# EAGLE board RK3188-EVB_Rev_C (EAGLE 9.6.2), part 1 of 3
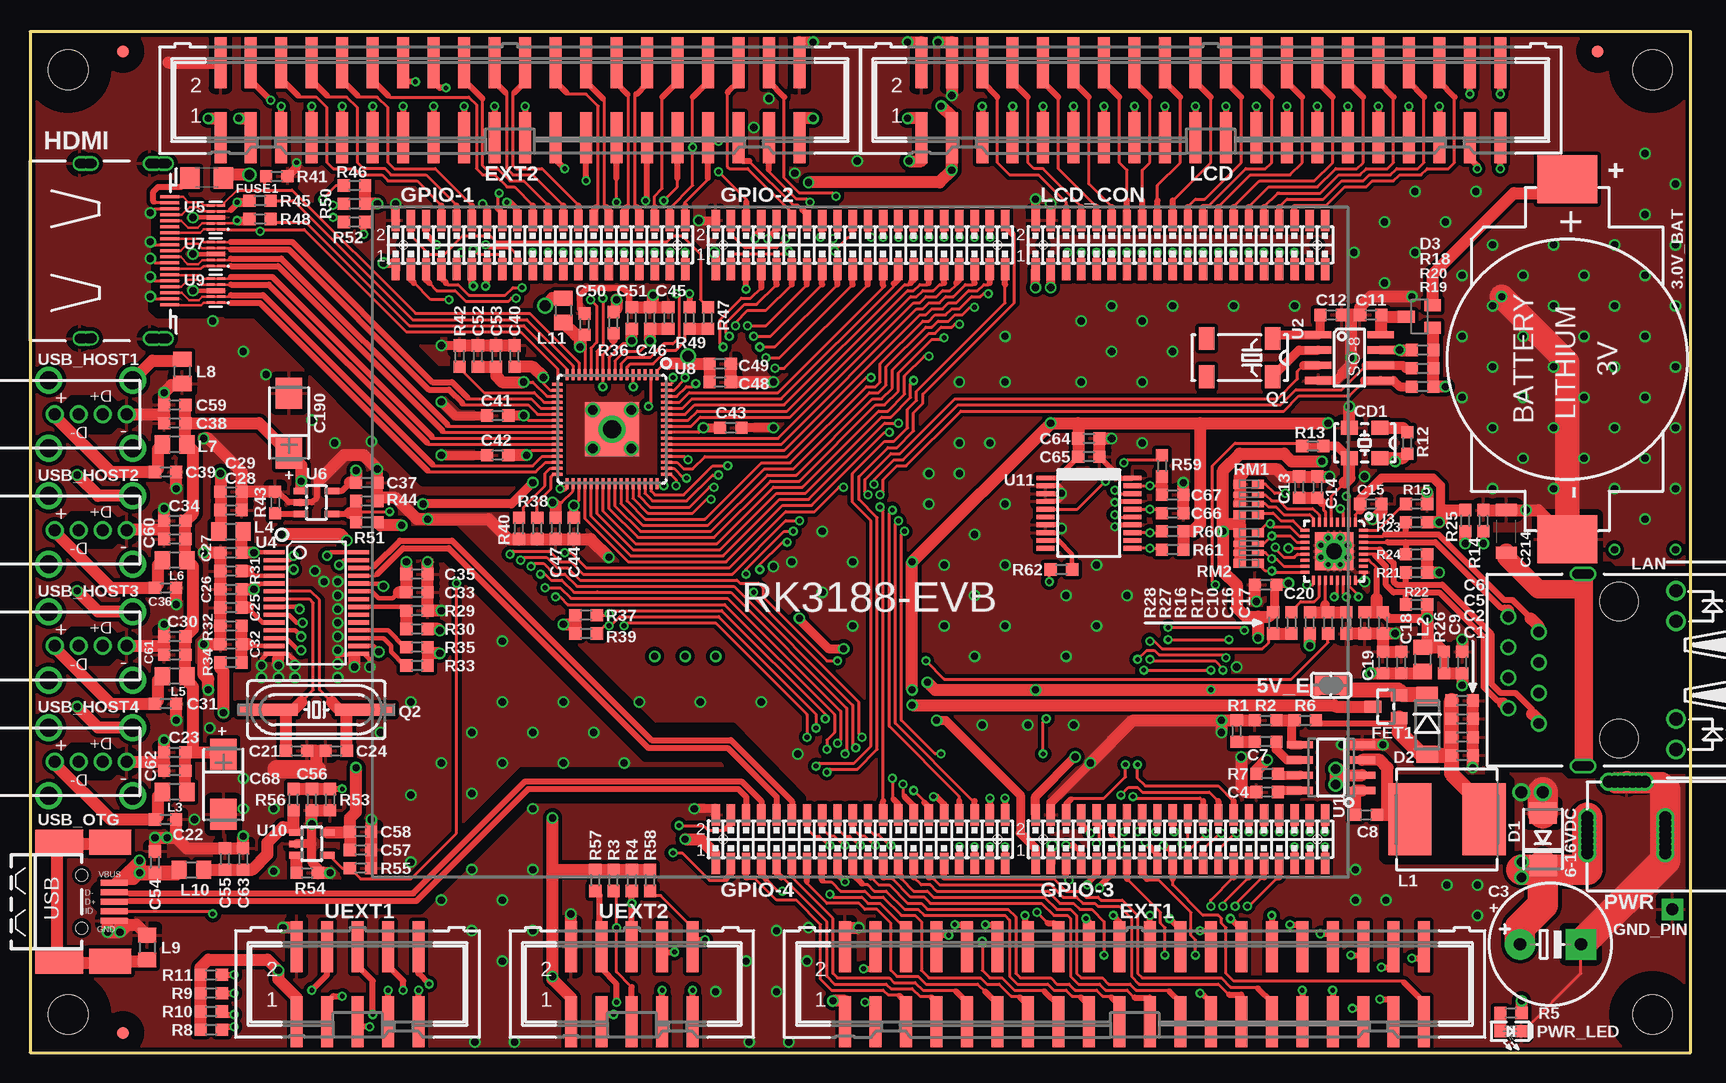
[diagram p0: board, top side]
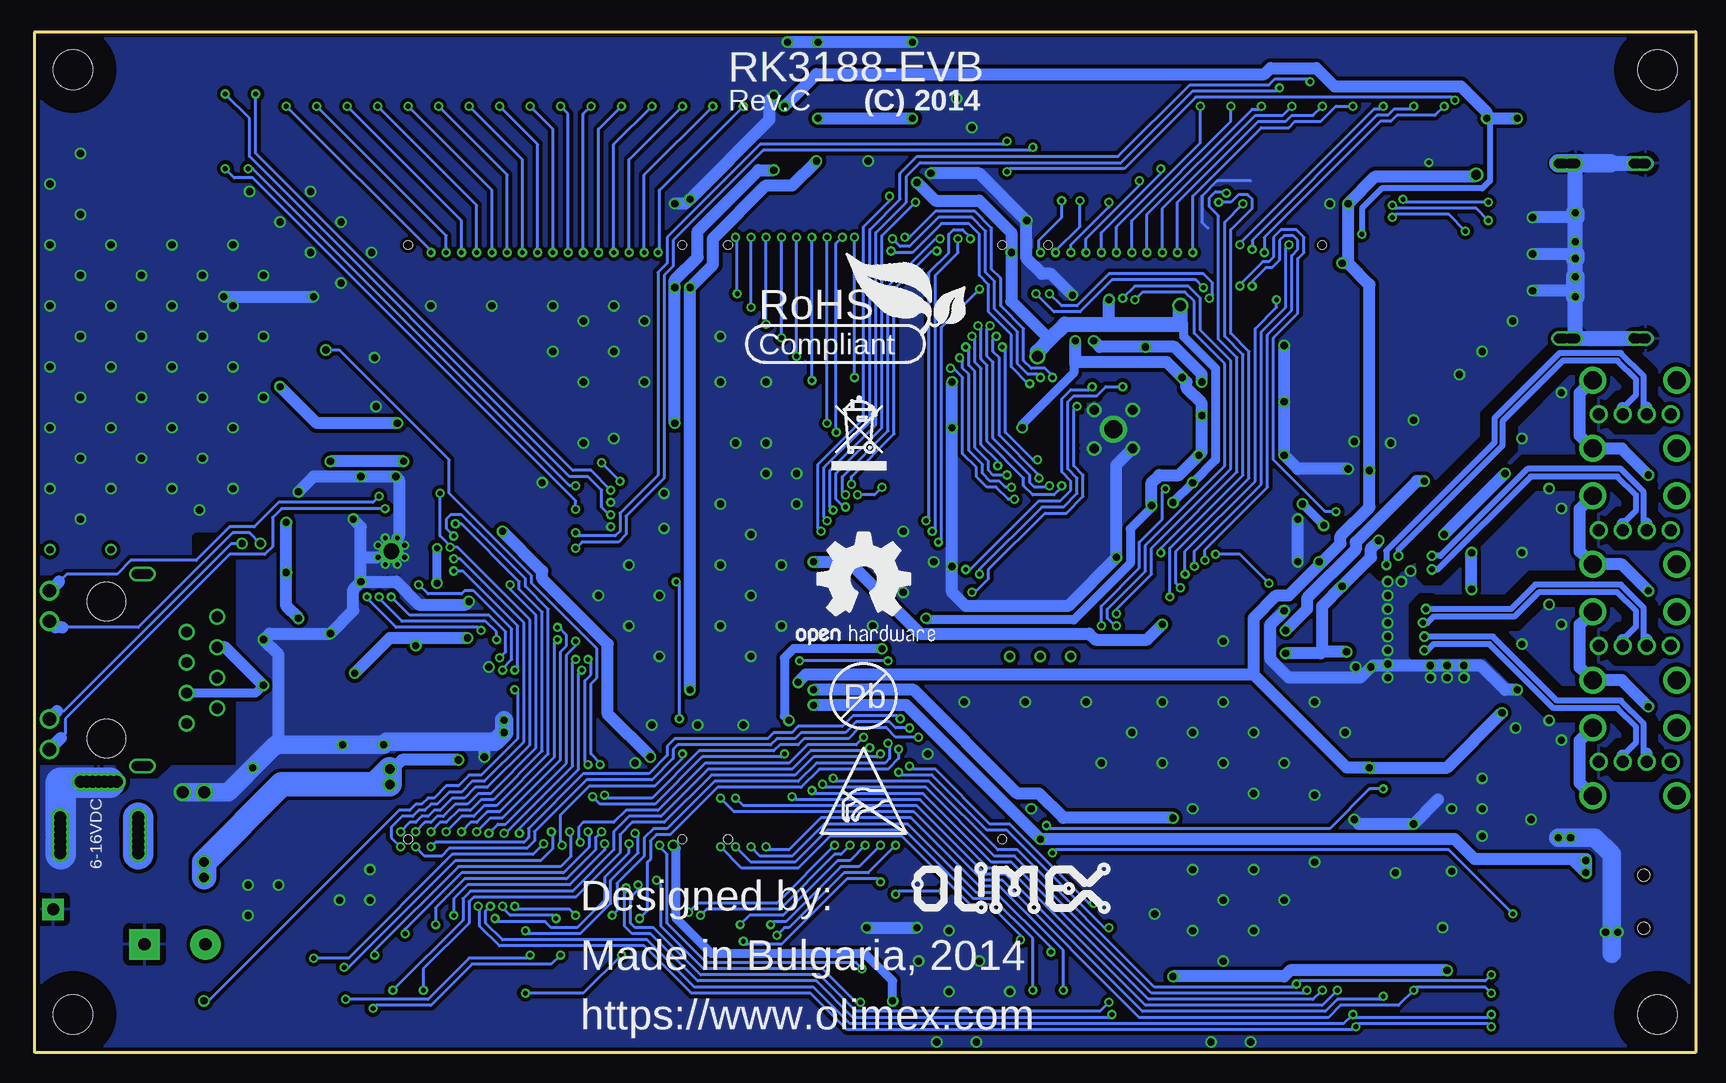
[diagram p1: board, bottom side, seen from below]

Size 138.43 x 85.09 mm. Coordinates in mm from the lower left corner, seen from the top.
Outline: 0,85.09 0,0 138.43,0 138.43,85.09 0,85.09
Copper layers (1+16): Top 0.035mm / dielectric 1.5mm / Bottom 0.035mm
Design rules "default": minimum track width 5mil, minimum drill 10mil, track to track 8mil, track to pad 8mil, pad to pad 8mil, via to via 8mil, smd to smd 1mil, copper to edge 10mil, drill to drill 8mil, minimum pad ring 7mil, minimum via ring 7mil, stop-mask expansion 4mil, vias tented up to drill 40mil, thermal gap 20mil
Net classes: 2 lan_sh: clearance 0.762 mm
Holes 3.3 mm at 135.25,3.17 3.17,81.92 3.17,3.17 135.25,81.92
tRestrict: area 0,0 to 6.3,6.3; area 0,78.7 to 6.3,85.1; area 132.1,78.7 to 138.4,85.1; area 132.1,0 to 138.4,6.3; 75 lines
bRestrict: area 0,78.7 to 6.3,85.1; area 132.1,78.7 to 138.4,85.1; area 132.1,0 to 138.4,6.3; area 0,0 to 6.3,6.3; 99 lines

## Footprints (pad centres in the part's own frame; a part is rotated, then mirrored left to right if it is on the bottom)
3V_BAT_HOLDER = smd 2 x 2: 1+ -15,0 | smd 4 x 5: + -15,0; - 15,0
SJ-CLOSE = smd 1.168 x 1.6: 1 -0.762,0; 2 0.762,0
C0603_DWS = smd 1.016 x 1.016: 1 -0.889,0; 2 0.889,0
E5-10,5 = drill 1.016 pad 2.54: + -2.54,0 | drill 1.016 pad 2.54 square: - 2.54,0
CT6032 = smd 2.6 x 2.2: + 2.5,0; - -2.5,0
C1206_5MILS_WS_ISO = smd 1.016 x 1.778: 1 -1.778,0; 2 1.778,0
5032-4P_HCX-3S = smd 1.4 x 1.2: 1 -1.27,-1.27; 2 1.27,-1.27; 3 1.27,1.27; 4 -1.27,1.27
DO214AA = smd 1.778 x 2.286: A 2.177,0; C -2.177,0
MLL-41 = smd 1.45 x 1.8: A 2.445,0; K -2.445,0
SOT23C = smd 1.4 x 1: 1 1.1,-0.95; 2 1.1,0.95; 3 -1.1,0
ML40-MALE(GBH-254-SMT-40) = smd 1 x 4.25: 1 -24.13,-3.125; 2 -24.13,3.125; 3 -21.59,-3.125; 4 -21.59,3.125; 5 -19.05,-3.125; 6 -19.05,3.125; 7 -16.51,-3.125; 8 -16.51,3.125; 9 -13.97,-3.125; 10 -13.97,3.125; 11 -11.43,-3.125; 12 -11.43,3.125; 13 -8.89,-3.125; 14 -8.89,3.125; 15 -6.35,-3.125; 16 -6.35,3.125; 17 -3.81,-3.125; 18 -3.81,3.125; 19 -1.27,-3.125; 20 -1.27,3.125; 21 1.27,-3.125; 22 1.27,3.125; 23 3.81,-3.125; 24 3.81,3.125; 25 6.35,-3.125; 26 6.35,3.125; 27 8.89,-3.125; 28 8.89,3.125; 29 11.43,-3.125; 30 11.43,3.125; 31 13.97,-3.125; 32 13.97,3.125; 33 16.51,-3.125; 34 16.51,3.125; 35 19.05,-3.125; 36 19.05,3.125; 37 21.59,-3.125; 38 21.59,3.125; 39 24.13,-3.125; 40 24.13,3.125
SOT23 = smd 1.4 x 1: 1 1.1,-0.95; 2 1.1,0.95; 3 -1.1,0
FIDUCIAL-1X3 = smd 1 x 1: 1 0,0
1206 = smd 1.6 x 1.8: 1 -1.4,0; 2 1.4,0
TEST_PAD40/70/SQUARE = drill 1.016 pad 1.778 square: P$1 0,0
HDMI-SWM-19 = smd 0.25 x 1.6: 1 -4.5,-5.55; 2 -4,-5.55; 3 -3.5,-5.55; 4 -3,-5.55; 5 -2.5,-5.55; 6 -2,-5.55; 7 -1.5,-5.55; 8 -1,-5.55; 9 -0.5,-5.55; 10 0,-5.55; 11 0.5,-5.55; 12 1,-5.55; 13 1.5,-5.55; 14 2,-5.55; 15 2.5,-5.55; 16 3,-5.55; 17 3.5,-5.55; 18 4,-5.55; 19 4.5,-5.55 | drill 0.8: P$5 -7.3,-4.85; P$7 -7.3,1.25; P$9 7.3,1.25; P$11 7.3,-4.85; P$13 -7.3,-4.45; P$15 -7.3,1.65; P$18 7.3,1.65; P$20 7.3,-4.45; P$21 -7.3,-4.15; P$22 -7.3,-5; P$23 7.3,-5; P$24 7.3,-4.15; P$25 -7.3,-5.3; P$26 7.3,-5.3; P$27 7.3,0.95; P$28 -7.275,0.95; SH1 -7.3,-3.9; SH2 -7.3,1.95; SH3 7.3,1.95; SH4 7.3,-3.9
8X8MM_3131 = smd 3.6 x 6: 1 -3.1,0; 2 3.1,0
L0805_5MIL_DWS = smd 1.27 x 1.524: 1 -1.016,0; 2 1.016,0
RJLBC-060TC1_MILLING = drill 0.9: 1 -4.455,6.7; 2 -3.185,9.24; 3 -1.915,6.7; 4 -0.645,9.24; 5 0.625,6.7; 6 1.895,9.24; 7 3.165,6.7; 8 4.435,9.24 | drill 0.8: _1 -8,2.5; _2 -8,2.7; _3 -8,2.9; _4 -8,3.3; _5 -8,3.5; _6 8,3.5; _7 8,3.3; _8 8,2.9; _9 8,2.7; _10 8,2.5; GND1 -8,3.1; GND2 8,3.1 | drill 1.1: AG 4.07,-4.748; AY -6.61,-4.748; KG 6.61,-4.748; KY -4.07,-4.748 | hole 3.2: -5.715,0; 5.715,0
PWR_JACK_UNI_MILLING = drill 1: + 0,4.75; +1 0,5.25; +2 0,5.75; +3 0,6.25; +4 0,4.25; +5 0,3.75; +6 0,3.25; - -6.5,4.75; -1 -6.5,5.25; -2 -6.5,5.75; -3 -6.5,4.25; -4 -6.5,3.75; -5 -6.5,6.25; -6 -6.5,3.25; -- -3.3,0.3; --1 -3.8,0.3; --2 -4.3,0.3; --3 -4.8,0.3; --4 -2.8,0.3; --5 -2.3,0.3; --6 -1.8,0.3
LED-0603 = smd 1.016 x 1.016: A 0.889,0; C -0.889,0
MC-306 = smd 1.3 x 1.9: 1 -2.75,-1.6; 2 2.75,-1.6; 3 2.75,1.6; 4 -2.75,1.6
HC49/SMD2_THIN = smd 5 x 1: 1 -4.064,0; 2 4.064,0
R0603_5MIL_DWS = smd 1.016 x 1.016: 1 -0.889,0; 2 0.889,0
0603_0R = smd 1.016 x 1.016: 1 -0.889,0; 2 0.889,0
RK3188-SOM-EVB_REV_B = smd 0.7 x 1.8: 1-1 -38.735,22.733; 1-2 -38.735,26.797; 1-3 -37.465,22.733; 1-4 -37.465,26.797; 1-5 -36.195,22.733; 1-6 -36.195,26.797; 1-7 -34.925,22.733; 1-8 -34.925,26.797; 1-9 -33.655,22.733; 1-10 -33.655,26.797; 1-11 -32.385,22.733; 1-12 -32.385,26.797; 1-13 -31.115,22.733; 1-14 -31.115,26.797; 1-15 -29.845,22.733; 1-16 -29.845,26.797; 1-17 -28.575,22.733; 1-18 -28.575,26.797; 1-19 -27.305,22.733; 1-20 -27.305,26.797; 1-21 -26.035,22.733; 1-22 -26.035,26.797; 1-23 -24.765,22.733; 1-24 -24.765,26.797; 1-25 -23.495,22.733; 1-26 -23.495,26.797; 1-27 -22.225,22.733; 1-28 -22.225,26.797; 1-29 -20.955,22.733; 1-30 -20.955,26.797; 1-31 -19.685,22.733; 1-32 -19.685,26.797; 1-33 -18.415,22.733; 1-34 -18.415,26.797; 1-35 -17.145,22.733; 1-36 -17.145,26.797; 1-37 -15.875,22.733; 1-38 -15.875,26.797; 1-39 -14.605,22.733; 1-40 -14.605,26.797; 2-1 -12.065,22.733; 2-2 -12.065,26.797; 2-3 -10.795,22.733; 2-4 -10.795,26.797; 2-5 -9.525,22.733; 2-6 -9.525,26.797; 2-7 -8.255,22.733; 2-8 -8.255,26.797; 2-9 -6.985,22.733; 2-10 -6.985,26.797; 2-11 -5.715,22.733; 2-12 -5.715,26.797; 2-13 -4.445,22.733; 2-14 -4.445,26.797; 2-15 -3.175,22.733; 2-16 -3.175,26.797; 2-17 -1.905,22.733; 2-18 -1.905,26.797; 2-19 -0.635,22.733; 2-20 -0.635,26.797; 2-21 0.635,22.733; 2-22 0.635,26.797; 2-23 1.905,22.733; 2-24 1.905,26.797; 2-25 3.175,22.733; 2-26 3.175,26.797; 2-27 4.445,22.733; 2-28 4.445,26.797; 2-29 5.715,22.733; 2-30 5.715,26.797; 2-31 6.985,22.733; 2-32 6.985,26.797; 2-33 8.255,22.733; 2-34 8.255,26.797; 2-35 9.525,22.733; 2-36 9.525,26.797; 2-37 10.795,22.733; 2-38 10.795,26.797; 2-39 12.065,22.733; 2-40 12.065,26.797; 3-1 14.605,-26.797; 3-2 14.605,-22.733; 3-3 15.875,-26.797; 3-4 15.875,-22.733; 3-5 17.145,-26.797; 3-6 17.145,-22.733; 3-7 18.415,-26.797; 3-8 18.415,-22.733; 3-9 19.685,-26.797; 3-10 19.685,-22.733; 3-11 20.955,-26.797; 3-12 20.955,-22.733; 3-13 22.225,-26.797; 3-14 22.225,-22.733; 3-15 23.495,-26.797; 3-16 23.495,-22.733; 3-17 24.765,-26.797; 3-18 24.765,-22.733; 3-19 26.035,-26.797; 3-20 26.035,-22.733; 3-21 27.305,-26.797; 3-22 27.305,-22.733; 3-23 28.575,-26.797; 3-24 28.575,-22.733; 3-25 29.845,-26.797; 3-26 29.845,-22.733; 3-27 31.115,-26.797; 3-28 31.115,-22.733; 3-29 32.385,-26.797; 3-30 32.385,-22.733; 3-31 33.655,-26.797; 3-32 33.655,-22.733; 3-33 34.925,-26.797; 3-34 34.925,-22.733; 3-35 36.195,-26.797; 3-36 36.195,-22.733; 3-37 37.465,-26.797; 3-38 37.465,-22.733; 3-39 38.735,-26.797; 3-40 38.735,-22.733; 4-1 -12.065,-26.797; 4-2 -12.065,-22.733; 4-3 -10.795,-26.797; 4-4 -10.795,-22.733; 4-5 -9.525,-26.797; 4-6 -9.525,-22.733; 4-7 -8.255,-26.797; 4-8 -8.255,-22.733; 4-9 -6.985,-26.797; 4-10 -6.985,-22.733; 4-11 -5.715,-26.797; 4-12 -5.715,-22.733; 4-13 -4.445,-26.797; 4-14 -4.445,-22.733; 4-15 -3.175,-26.797; 4-16 -3.175,-22.733; 4-17 -1.905,-26.797; 4-18 -1.905,-22.733; 4-19 -0.635,-26.797; 4-20 -0.635,-22.733; 4-21 0.635,-26.797; 4-22 0.635,-22.733; 4-23 1.905,-26.797; 4-24 1.905,-22.733; 4-25 3.175,-26.797; 4-26 3.175,-22.733; 4-27 4.445,-26.797; 4-28 4.445,-22.733; 4-29 5.715,-26.797; 4-30 5.715,-22.733; 4-31 6.985,-26.797; 4-32 6.985,-22.733; 4-33 8.255,-26.797; 4-34 8.255,-22.733; 4-35 9.525,-26.797; 4-36 9.525,-22.733; 4-37 10.795,-26.797; 4-38 10.795,-22.733; 4-39 12.065,-26.797; 4-40 12.065,-22.733; LCD-1 14.605,22.733; LCD-2 14.605,26.797; LCD-3 15.875,22.733; LCD-4 15.875,26.797; LCD-5 17.145,22.733; LCD-6 17.145,26.797; LCD-7 18.415,22.733; LCD-8 18.415,26.797; LCD-9 19.685,22.733; LCD-10 19.685,26.797; LCD-11 20.955,22.733; LCD-12 20.955,26.797; LCD-13 22.225,22.733; LCD-14 22.225,26.797; LCD-15 23.495,22.733; LCD-16 23.495,26.797; LCD-17 24.765,22.733; LCD-18 24.765,26.797; LCD-19 26.035,22.733; LCD-20 26.035,26.797; LCD-21 27.305,22.733; LCD-22 27.305,26.797; LCD-23 28.575,22.733; LCD-24 28.575,26.797; LCD-25 29.845,22.733; LCD-26 29.845,26.797; LCD-27 31.115,22.733; LCD-28 31.115,26.797; LCD-29 32.385,22.733; LCD-30 32.385,26.797; LCD-31 33.655,22.733; LCD-32 33.655,26.797; LCD-33 34.925,22.733; LCD-34 34.925,26.797; LCD-35 36.195,22.733; LCD-36 36.195,26.797; LCD-37 37.465,22.733; LCD-38 37.465,26.797; LCD-39 38.735,22.733; LCD-40 38.735,26.797 | hole 0.7: -38.1,24.765; -15.24,24.765; -11.43,-24.765; 11.43,-24.765; 15.24,-24.765; 38.1,-24.765; -11.43,24.765; 11.43,24.765; 15.24,24.765; 38.1,24.765
R_MATRIX_4 = smd 0.762 x 1.016: 1.1 -1.27,-0.762; 1.2 -1.27,0.762; 4.1 1.27,-0.762; 4.2 1.27,0.762 | smd 0.508 x 1.016: 2.1 -0.381,-0.762; 2.2 -0.381,0.762; 3.1 0.381,-0.762; 3.2 0.381,0.762
SOIC8 = smd 0.6 x 2.2: 1 -1.905,-2.6; 2 -0.635,-2.6; 3 0.635,-2.6; 4 1.905,-2.6; 5 1.905,2.6; 6 0.635,2.6; 7 -0.635,2.6; 8 -1.905,2.6
SO-8 = smd 0.6 x 2.2: 1 -1.905,-2.6; 2 -0.635,-2.6; 3 0.635,-2.6; 4 1.905,-2.6; 5 1.905,2.6; 6 0.635,2.6; 7 -0.635,2.6; 8 -1.905,2.6
QFN-32(DRILLS) = smd 0.25 x 0.75: 1 -1.75,-2.425; 2 -1.25,-2.425; 3 -0.75,-2.425; 4 -0.25,-2.425; 5 0.25,-2.425; 6 0.75,-2.425; 7 1.25,-2.425; 8 1.75,-2.425; 17 1.75,2.425; 18 1.25,2.425; 19 0.75,2.425; 20 0.25,2.425; 21 -0.25,2.425; 22 -0.75,2.425; 23 -1.25,2.425; 24 -1.75,2.425 | smd 0.75 x 0.25: 9 2.425,-1.75; 10 2.425,-1.25; 11 2.425,-0.75; 12 2.425,-0.25; 13 2.425,0.25; 14 2.425,0.75; 15 2.425,1.25; 16 2.425,1.75; 25 -2.425,1.75; 26 -2.425,1.25; 27 -2.425,0.75; 28 -2.425,0.25; 29 -2.425,-0.25; 30 -2.425,-0.75; 31 -2.425,-1.25; 32 -2.425,-1.75 | drill 1.3: EP1 0,0 | drill 0.4: EP2 -0.5,1.1; EP3 0.5,1.1; EP4 1.1,0.5; EP5 1.1,-0.5; EP6 0.5,-1.1; EP7 -0.5,-1.1; EP8 -1.1,-0.5; EP9 -1.1,0.5 | smd 3.2 x 3.2: EXP_PAD 0,0
SSOP28 = smd 0.35 x 1.75: 1 -4.225,-3.525; 2 -3.575,-3.525; 3 -2.925,-3.525; 4 -2.275,-3.525; 5 -1.625,-3.525; 6 -0.975,-3.525; 7 -0.325,-3.525; 8 0.325,-3.525; 9 0.975,-3.525; 10 1.625,-3.525; 11 2.275,-3.525; 12 2.925,-3.525; 13 3.575,-3.525; 14 4.225,-3.525; 15 4.225,3.525; 16 3.575,3.525; 17 2.925,3.525; 18 2.275,3.525; 19 1.625,3.525; 20 0.975,3.525; 21 0.325,3.525; 22 -0.325,3.525; 23 -0.975,3.525; 24 -1.625,3.525; 25 -2.275,3.525; 26 -2.925,3.525; 27 -3.575,3.525; 28 -4.225,3.525
SLP2510P8 = smd 0.2 x 0.675: 1 -1,-0.438; 2 -0.5,-0.438; 4 0.5,-0.438; 5 1,-0.438; 6 1,0.438; 7 0.5,0.438; 9 -0.5,0.438; 10 -1,0.438 | smd 0.4 x 0.775: 3 0,-0.388; 8 0,0.388
SOT23-5 = smd 1.2 x 0.55: 1 1.3,-0.95; 2 1.3,0; 3 1.3,0.95; 4 -1.3,0.95; 5 -1.3,-0.95
QFN64(IT66121FN) = smd 0.9 x 0.25: 1 -4.55,3.75; 2 -4.55,3.25; 3 -4.55,2.75; 4 -4.55,2.25; 5 -4.55,1.75; 6 -4.55,1.25; 7 -4.55,0.75; 8 -4.55,0.25; 9 -4.55,-0.25; 10 -4.55,-0.75; 11 -4.55,-1.25; 12 -4.55,-1.75; 13 -4.55,-2.25; 14 -4.55,-2.75; 15 -4.55,-3.25; 16 -4.55,-3.75; 33 4.55,-3.75; 34 4.55,-3.25; 35 4.55,-2.75; 36 4.55,-2.25; 37 4.55,-1.75; 38 4.55,-1.25; 39 4.55,-0.75; 40 4.55,-0.25; 41 4.55,0.25; 42 4.55,0.75; 43 4.55,1.25; 44 4.55,1.75; 45 4.55,2.25; 46 4.55,2.75; 47 4.55,3.25; 48 4.55,3.75 | smd 0.25 x 0.9: 17 -3.75,-4.55; 18 -3.25,-4.55; 19 -2.75,-4.55; 20 -2.25,-4.55; 21 -1.75,-4.55; 22 -1.25,-4.55; 23 -0.75,-4.55; 24 -0.25,-4.55; 25 0.25,-4.55; 26 0.75,-4.55; 27 1.25,-4.55; 28 1.75,-4.55; 29 2.25,-4.55; 30 2.75,-4.55; 31 3.25,-4.55; 32 3.75,-4.55; 49 3.75,4.55; 50 3.25,4.55; 51 2.75,4.55; 52 2.25,4.55; 53 1.75,4.55; 54 1.25,4.55; 55 0.75,4.55; 56 0.25,4.55; 57 -0.25,4.55; 58 -0.75,4.55; 59 -1.25,4.55; 60 -1.75,4.55; 61 -2.25,4.55; 62 -2.75,4.55; 63 -3.25,4.55; 64 -3.75,4.55 | smd 4.5 x 4.5: GND 0,0 | drill 1.5: GND1 0,0 | drill 0.8: GND2 -1.6,1.6; GND3 1.6,1.6; GND4 1.6,-1.6; GND5 -1.6,-1.6
SSOP20 = smd 0.4 x 1.5: 1 -2.925,-3.625; 2 -2.275,-3.625; 3 -1.625,-3.625; 4 -0.975,-3.625; 5 -0.325,-3.625; 6 0.325,-3.625; 7 0.975,-3.625; 8 1.625,-3.625; 9 2.275,-3.625; 10 2.925,-3.625; 11 2.925,3.625; 12 2.275,3.625; 13 1.625,3.625; 14 0.975,3.625; 15 0.325,3.625; 16 -0.325,3.625; 17 -0.975,3.625; 18 -1.625,3.625; 19 -2.275,3.625; 20 -2.925,3.625
ML10_S = smd 1 x 4.25: 1 -5.08,-3.125; 2 -5.08,3.125; 3 -2.54,-3.125; 4 -2.54,3.125; 5 0,-3.125; 6 0,3.125; 7 2.54,-3.125; 8 2.54,3.125; 9 5.08,-3.125; 10 5.08,3.125
USB_A_VERTICAL_PTH = drill 1: 1 3.45,12.75; 2 3.45,14.75; 3 3.45,16.75; 4 3.45,18.75 | drill 1.5: P$1 0.6,12.25; P$2 6.3,12.25; P$3 6.3,19.25; P$4 0.6,19.25
USB_MINI_9PIN = smd 2.25 x 0.5: D+ 2.706,0; D- 2.706,0.8; GND 2.706,-1.6; ID 2.706,-0.8; VBUS 2.706,1.6 | smd 4 x 2.1: GND1 -1.9,4.95; GND3 -1.9,-4.95 | smd 3.5 x 2.1: GND2 2.35,4.95; GND4 2.35,-4.95 | hole 1: 0,2.2; 0,-2.2

## Placement (x,y rotation side)
3.0V_BAT  BTH-V-20-LF  [3V_BAT_HOLDER]  128.14,57.78 270 top
5V_E  Close  [SJ-CLOSE]  108.46,30.61 180 top
C1  22uF/6.3V  [C0603_DWS]  119.38,24.77 0 top
C2  22uF/6.3V  [C0603_DWS]  119.38,26.29 0 top
C3  470uF/25V/LOWESR/105C  [E5-10,5]  126.75,9.02 0 top
C4  100nF  [C0603_DWS]  103.12,21.72 180 top
C5  22uF/6.3V  [C0603_DWS]  119.38,27.81 0 top
C6  22uF/6.3V  [C0603_DWS]  119.38,29.34 0 top
C7  3.3nF  [C0603_DWS]  103,25.91 180 top
C8  10nF  [C0603_DWS]  111.38,19.81 0 top
C9  100nF  [C0603_DWS]  119.38,32.51 270 top
C10  10uF/6.3V  [C0603_DWS]  109.73,35.81 90 top
C11  100nF  [C0603_DWS]  111.76,61.47 0 top
C12  10pF  [C0603_DWS]  108.46,61.47 0 top
C13  100nF  [C0603_DWS]  105.79,47.12 270 top
C14  2.2uF/6.3V  [C0603_DWS]  107.31,47.12 270 top
C15  100nF  [C0603_DWS]  111.76,45.72 180 top
C16  100nF  [C0603_DWS]  111.25,35.81 90 top
C17  22uF/6.3V  [C0603_DWS]  112.78,35.81 90 top
C18  22uF/6.3V  [C0603_DWS]  114.3,32.51 270 top
C19  22uF/6.3V  [C0603_DWS]  112.78,32.51 270 top
C20  100nF  [C0603_DWS]  103,38.99 0 top
C21  33pF  [C0603_DWS]  22.23,25.15 180 top
C22  100nF  [C0603_DWS]  11.3,19.43 0 top
C23  22uF/6.3V  [C0603_DWS]  12.06,25.02 0 top
C24  33pF  [C0603_DWS]  25.53,25.15 0 top
C25  100nF  [C0603_DWS]  16.76,37.08 180 top
C26  100nF  [C0603_DWS]  16.76,38.61 180 top
C27  100nF  [C0603_DWS]  16.76,41.66 180 top
C28  10uF/6.3V  [C0603_DWS]  16.76,45.21 0 top
C29  100nF  [C0603_DWS]  16.76,46.74 0 top
C30  22uF/6.3V  [C0603_DWS]  12.06,34.67 0 top
C31  100nF  [C0603_DWS]  11.3,29.08 0 top
C32  2.2uF/6.3V  [C0603_DWS]  16.76,34.04 0 top
C33  100nF  [C0603_DWS]  32.26,38.35 0 top
C34  22uF/6.3V  [C0603_DWS]  12.06,44.32 0 top
C35  10uF/6.3V  [C0603_DWS]  32.26,39.88 0 top
C36  100nF  [C0603_DWS]  11.3,38.73 0 top
C37  22uF/6.3V  [C0603_DWS]  28.07,47.5 0 top
C38  22uF/6.3V  [C0603_DWS]  12.06,52.45 0 top
C39  100nF  [C0603_DWS]  11.3,48.39 0 top
C40  100nF  [C0603_DWS]  40.39,58.04 90 top
C41  100nF  [C0603_DWS]  38.99,53.09 180 top
C42  100nF  [C0603_DWS]  38.99,49.78 180 top
C43  100nF  [C0603_DWS]  58.42,52.07 0 top
C44  100nF  [C0603_DWS]  45.34,43.69 270 top
C45  100nF  [C0603_DWS]  53.21,61.21 90 top
C46  22uF/6.3V  [C0603_DWS]  51.69,61.21 90 top
C47  100nF  [C0603_DWS]  43.81,43.69 270 top
C48  100nF  [C0603_DWS]  57.53,55.88 0 top
C49  22uF/6.3V  [C0603_DWS]  57.53,57.4 0 top
C50  100nF  [C0603_DWS]  46.23,60.71 90 top
C51  100nF  [C0603_DWS]  50.16,61.21 90 top
C52  100nF  [C0603_DWS]  37.34,58.04 90 top
C53  22uF/6.3V  [C0603_DWS]  38.86,58.04 90 top
C54  100nF  [C0603_DWS]  10.41,15.88 90 top
C55  22uF/6.3V  [C0603_DWS]  16.26,16.13 90 top
C56  100nF  [C0603_DWS]  23.5,21.08 270 top
C57  100nF  [C0603_DWS]  27.56,16.89 0 top
C58  22uF/6.3V  [C0603_DWS]  27.56,18.41 0 top
C59  22uF/6.3V  [C0603_DWS]  12.06,53.98 0 top
C60  22uF/6.3V  [C0603_DWS]  12.06,42.8 0 top
C61  22uF/6.3V  [C0603_DWS]  12.06,33.15 0 top
C62  22uF/6.3V  [C0603_DWS]  12.06,23.5 0 top
C63  22uF/6.3V  [C0603_DWS]  17.78,16.13 90 top
C64  10uF/6.3V  [C0603_DWS]  88.27,51.18 0 top
C65  100nF  [C0603_DWS]  88.27,49.66 0 top
C66  10nF  [C0603_DWS]  95.25,44.96 180 top
C67  10nF  [C0603_DWS]  95.25,46.48 180 top
C68  NA(220uF/6.3V/tant)  [CT6032]  16.13,22.35 90 top
C190  NA(220uF/6.3V/tant)  [CT6032]  21.59,52.45 270 top
C214  1nF/2kV/X7R/1206  [C1206_5MILS_WS_ISO]  123.06,43.43 90 top
CD1  NA(50Mhz_osc_5032_4p)  [5032-4P_HCX-3S]  111.25,50.8 180 top
D1  SMBJ16A  [DO214AA]  126.11,17.78 90 top
D2  1N5822/SS34/SMA  [MLL-41]  116.46,27.3 270 top
D3  BAT54C  [SOT23C]  115.82,61.34 0 top
EXT1  GBH-254-SMT-40  [ML40-MALE(GBH-254-SMT-40)]  92.08,5.71 0 top
EXT2  GBH-254-SMT-40  [ML40-MALE(GBH-254-SMT-40)]  40.01,79.38 0 top
FET1  IRLML6402  [SOT23]  113.03,28.83 0 top
FID1  FIDUCIAL  [FIDUCIAL-1X3]  7.75,83.44 0 top
FID3  FIDUCIAL  [FIDUCIAL-1X3]  7.75,1.65 180 top
FID4  FIDUCIAL  [FIDUCIAL-1X3]  130.68,83.44 180 top
FUSE1  FSMD035  [1206]  14.73,72.9 180 top
GND_PIN  TESTPAD3  [TEST_PAD40/70/SQUARE]  136.91,11.94 180 top
HDMI  HDMI-MC34931HDMI-SWM-19  [HDMI-SWM-19]  6.1,66.8 90 top
L1  10uH/3.15A/20%  [8X8MM_3131]  118.11,19.43 0 top
L2  FB0805/600R/200mA(201209-601)  [L0805_5MIL_DWS]  116.08,32.77 270 top
L3  FB0805/600R/2A  [L0805_5MIL_DWS]  12.06,21.72 180 top
L4  FB0805/600R/2A  [L0805_5MIL_DWS]  16.76,43.43 0 top
L5  FB0805/600R/2A  [L0805_5MIL_DWS]  12.06,31.37 180 top
L6  FB0805/600R/2A  [L0805_5MIL_DWS]  12.06,41.02 180 top
L7  FB0805/600R/2A  [L0805_5MIL_DWS]  12.06,50.67 180 top
L8  FB0805/600R/2A  [L0805_5MIL_DWS]  12.7,56.77 90 top
L9  FB0805/600R/200mA(201209-601)  [L0805_5MIL_DWS]  9.78,8.76 270 top
L10  FB0805/600R/2A  [L0805_5MIL_DWS]  13.46,15.24 0 top
L11  CL470nH/0805/1.76R/250mA  [L0805_5MIL_DWS]  44.45,61.85 270 top
LAN  RJLBC-060TC1  [RJLBC-060TC1_MILLING]  132.46,31.88 90 top
LCD  GBH-254-SMT-40  [ML40-MALE(GBH-254-SMT-40)]  98.42,79.38 0 top
PWR  YDJ-1136  [PWR_JACK_UNI_MILLING]  129.79,22.86 180 top
PWR_LED  LED/RED/0603  [LED-0603]  123.44,1.78 180 top
Q1  MC-306_32.768KHZ/6pF  [MC-306]  100.84,57.91 180 top
Q2  Q12.000MHz/HC-49SM/SMD/20ppm/20pF  [HC49/SMD2_THIN]  23.88,28.57 0 top
R1  2.2k  [R0603_5MIL_DWS]  100.58,26.8 90 top
R2  1.05k/1%  [R0603_5MIL_DWS]  103,27.69 180 top
R3  NA(2.2k)  [R0603_5MIL_DWS]  48.64,14.35 90 top
R4  NA(2.2k)  [R0603_5MIL_DWS]  50.16,14.35 90 top
R5  2.2k  [R0603_5MIL_DWS]  123.44,3.3 180 top
R6  4.99k/1%  [R0603_5MIL_DWS]  106.3,27.69 0 top
R7  10k  [R0603_5MIL_DWS]  103.12,23.24 0 top
R8  NA(2.2k)  [R0603_5MIL_DWS]  15.11,1.91 180 top
R9  100k  [R0603_5MIL_DWS]  15.11,4.95 180 top
R10  NA(2.2k)  [R0603_5MIL_DWS]  15.11,3.43 180 top
R11  100k  [R0603_5MIL_DWS]  15.11,6.48 180 top
R12  NA(47k)  [R0603_5MIL_DWS]  114.81,50.8 90 top
R13  0R(board_mounted)  [0603_0R]  106.93,50.55 0 top
R14  560R  [R0603_5MIL_DWS]  121.16,44.32 90 top
R15  12.1k/1%  [R0603_5MIL_DWS]  115.57,45.72 180 top
R16  10k  [R0603_5MIL_DWS]  106.68,35.81 90 top
R17  NA  [R0603_5MIL_DWS]  108.2,35.81 90 top
R18  10k  [R0603_5MIL_DWS]  116.08,58.55 0 top
R19  NA  [R0603_5MIL_DWS]  116.08,55.5 0 top
R20  NA  [R0603_5MIL_DWS]  116.08,57.02 0 top
R21  49.9R/1%  [R0603_5MIL_DWS]  115.57,40.01 0 top
R22  49.9R/1%  [R0603_5MIL_DWS]  115.57,37.34 0 top
R23  49.9R/1%  [R0603_5MIL_DWS]  115.57,44.2 0 top
R24  49.9R/1%  [R0603_5MIL_DWS]  115.57,41.53 0 top
R25  560R  [R0603_5MIL_DWS]  119.63,44.32 270 top
R26  0R(board_mounted)  [0603_0R]  117.86,32.51 90 top
R27  150R  [R0603_5MIL_DWS]  105.16,35.81 90 top
R28  10k  [R0603_5MIL_DWS]  103.63,35.81 90 top
R29  NA(10k)  [R0603_5MIL_DWS]  32.26,36.83 180 top
R30  NA(5.1k)  [R0603_5MIL_DWS]  32.26,35.31 0 top
R31  680R/1%  [R0603_5MIL_DWS]  16.76,40.13 0 top
R32  NA(47k)  [R0603_5MIL_DWS]  16.76,35.56 180 top
R33  10k  [R0603_5MIL_DWS]  32.26,32.26 180 top
R34  4.99k/1%  [R0603_5MIL_DWS]  16.76,32.51 180 top
R35  47k  [R0603_5MIL_DWS]  32.26,33.78 180 top
R36  10k  [R0603_5MIL_DWS]  48.64,60.83 90 top
R37  2.2k  [R0603_5MIL_DWS]  46.35,36.45 180 top
R38  10k  [R0603_5MIL_DWS]  42.29,43.69 270 top
R39  2.2k  [R0603_5MIL_DWS]  46.35,34.92 180 top
R40  10k  [R0603_5MIL_DWS]  40.77,43.69 270 top
R41  47k  [R0603_5MIL_DWS]  20.57,73.03 0 top
R42  10k  [R0603_5MIL_DWS]  35.81,58.04 90 top
R43  6.8k/1%  [R0603_5MIL_DWS]  20.45,45.85 270 top
R44  10k  [R0603_5MIL_DWS]  28.07,45.97 180 top
R45  22R  [R0603_5MIL_DWS]  19.18,70.99 0 top
R46  2.2k  [R0603_5MIL_DWS]  27.05,72.26 0 top
R47  22R  [R0603_5MIL_DWS]  56.52,61.21 270 top
R48  22R  [R0603_5MIL_DWS]  19.18,69.47 0 top
R49  22R  [R0603_5MIL_DWS]  54.99,61.21 270 top
R50  2.2k  [R0603_5MIL_DWS]  27.05,70.74 0 top
R51  NA  [R0603_5MIL_DWS]  28.07,44.2 180 top
R52  10k  [R0603_5MIL_DWS]  27.05,69.22 0 top
R53  100k  [R0603_5MIL_DWS]  25.02,21.08 90 top
R54  13k/1%  [R0603_5MIL_DWS]  23.11,14.99 180 top
R55  100k  [R0603_5MIL_DWS]  27.56,15.37 180 top
R56  47k  [R0603_5MIL_DWS]  21.97,21.08 270 top
R57  100k  [R0603_5MIL_DWS]  47.12,14.35 90 top
R58  100k  [R0603_5MIL_DWS]  51.69,14.35 90 top
R59  20k  [R0603_5MIL_DWS]  94.36,48.9 270 top
R60  2.2k  [R0603_5MIL_DWS]  95.25,43.43 0 top
R61  2.2k  [R0603_5MIL_DWS]  95.25,41.91 0 top
R62  560R  [R0603_5MIL_DWS]  85.98,40.26 180 top
RK3188-SOM-EVB_PLATFORM1  RK3188-SOM-EVB_REV_B-5XGPH127SMT-02X20(PA-V16X-2X20-LF)  [RK3188-SOM-EVB_REV_B]  69.22,42.55 0 top
RM1  RA1206_(4X0603)_4B8_4.7k  [R_MATRIX_4]  101.6,46.1 90 top
RM2  RA1206_(4X0603)_4B8_4.7k  [R_MATRIX_4]  101.6,42.04 270 top
U1  MP1482DS  [SOIC8]  108.46,23.75 90 top
U2  PCF8563T/5  [SO-8]  109.98,57.91 270 top
U3  LAN8710A-EZC  [QFN-32(DRILLS)]  108.71,41.78 180 top
U4  GL850G-HHGXX  [SSOP28]  23.88,37.47 270 top
U5  RCLAMP0524P  [SLP2510P8]  15.49,69.6 90 top
U6  SY6280  [SOT23-5]  23.88,45.85 180 top
U7  RCLAMP0524P  [SLP2510P8]  15.49,66.55 90 top
U8  IT66121FN  [QFN64(IT66121FN)]  48.51,51.94 270 top
U9  RCLAMP0524P  [SLP2510P8]  15.49,63.5 90 top
U10  SY6280  [SOT23-5]  23.5,17.4 180 top
U11  AR1021-I/SS  [SSOP20]  88.27,44.96 270 top
U$2  [LOGO-OPENHARDWARE_8X8]  69.34,39.37 0 bottom
U$3  [OLIMEX1_V]  47.62,11.43 0 bottom
U$9  [PB]  69.34,29.72 0 bottom
U$10  [ESD_SYMBOL]  72.9,18.29 0 bottom
U$11  [RECYCLE_BIN1/8]  72.01,48.51 0 bottom
U$12  [ROHS]  78.11,58.17 0 bottom
UEXT1  GBH-254-SMT-10  [ML10_S]  27.3,5.71 0 top
UEXT2  GBH-254-SMT-10  [ML10_S]  50.16,5.71 0 top
USB_HOST1  USB_A_VERTICAL  [USB_A_VERTICAL_PTH]  -10.67,56.64 270 top
USB_HOST2  USB_A_VERTICAL  [USB_A_VERTICAL_PTH]  -10.67,46.99 270 top
USB_HOST3  USB_A_VERTICAL  [USB_A_VERTICAL_PTH]  -10.67,37.34 270 top
USB_HOST4  USB_A_VERTICAL  [USB_A_VERTICAL_PTH]  -10.67,27.69 270 top
USB_OTG  USB-OTG  [USB_MINI_9PIN]  4.32,12.57 0 top

## Library data of the parts
3.0V_BAT PWR_LED = DOUBLE-SIDE
5V_E = jumper
C1-C68 C190 C214 L2-L11 R1-R12 R14-R25 R27-R62 = rcl
CD1 D2 FUSE1 GND_PIN PWR = gogo
D1 L1 R13 R26 RM1 RM2 = OLIMEX_DISCRET
D3 = semicon-smd-ipc
EXT1 EXT2 LCD UEXT1 UEXT2 = con-harting-ml
FET1 = Penko
FID1 FID3 FID4 = SparkFunEagle-6-6-07
HDMI LAN USB_HOST1-USB_HOST4 USB_OTG = OLIMEX_CONNECTORS
Q1 Q2 = crystal
RK3188-SOM-EVB_PLATFORM1 = OLIMEX_CASES
U1-U11 = OLIMEX_IC
U$2 U$3 U$9-U$12 = olimex_logo1

## Nets
#OVCUR1: R29.2 R30.1 U4.21
+5V: 5V_E.2 C33.1 C35.1 C37.1 C57.1 C58.1 EXT2.39 FUSE1.1 LCD.1 R5.1 R34.2 R46.2 R50.2 RK3188-SOM-EVB_PLATFORM1.1-1 RK3188-SOM-EVB_PLATFORM1.LCD-1 U4.23 U6.5 U10.5
+5V_OTG_PWR: C54.1 FET1.3 L10.1 RK3188-SOM-EVB_PLATFORM1.4-1 USB_OTG.VBUS
+12V: C3.+ D1.C PWR.+ R7.1 U1.2
ADC_IN0: EXT1.3 RK3188-SOM-EVB_PLATFORM1.3-5
ADC_IN2: EXT1.4 RK3188-SOM-EVB_PLATFORM1.3-7
AVDD2: C25.1 C26.1 C27.1 L4.2 U4.1 U4.5 U4.10
CIF_CLKI: EXT2.20 RK3188-SOM-EVB_PLATFORM1.1-24
CIF_CLKO: EXT2.22 RK3188-SOM-EVB_PLATFORM1.1-26
CIF_D0: EXT2.13 RK3188-SOM-EVB_PLATFORM1.1-21
CIF_D1: EXT2.15 RK3188-SOM-EVB_PLATFORM1.1-23
CIF_D2: EXT2.17 RK3188-SOM-EVB_PLATFORM1.1-25
CIF_D3: EXT2.19 RK3188-SOM-EVB_PLATFORM1.1-27
CIF_D4: EXT2.21 RK3188-SOM-EVB_PLATFORM1.1-29
CIF_D5: EXT2.23 RK3188-SOM-EVB_PLATFORM1.1-31
CIF_D6: EXT2.25 RK3188-SOM-EVB_PLATFORM1.1-33
CIF_D7: EXT2.27 RK3188-SOM-EVB_PLATFORM1.1-35
CIF_D8: EXT2.29 RK3188-SOM-EVB_PLATFORM1.1-37
CIF_D9: EXT2.31 RK3188-SOM-EVB_PLATFORM1.1-39
CIF_D10/SDA: EXT2.33 R60.1 RK3188-SOM-EVB_PLATFORM1.1-40 U11.13
CIF_D11/SCL: EXT2.34 R61.1 RK3188-SOM-EVB_PLATFORM1.1-38 U11.11
CIF_D12: EXT2.32 RK3188-SOM-EVB_PLATFORM1.1-36
CIF_D13: EXT2.30 RK3188-SOM-EVB_PLATFORM1.1-34
CIF_D14: EXT2.28 RK3188-SOM-EVB_PLATFORM1.1-32
CIF_D15: EXT2.26 RK3188-SOM-EVB_PLATFORM1.1-30
CIF_HREF: EXT2.18 RK3188-SOM-EVB_PLATFORM1.1-22
CIF_VSYNC: EXT2.24 RK3188-SOM-EVB_PLATFORM1.1-28
DM1: U4.27 USB_HOST1.2
DM2: U4.2 USB_HOST2.2
DM3: U4.8 USB_HOST3.2
DM4: U4.11 USB_HOST4.2
DP1: U4.28 USB_HOST1.3
DP2: U4.3 USB_HOST2.3
DP3: U4.9 USB_HOST3.3
DP4: U4.12 USB_HOST4.3
DVDD1: C28.1 C29.1 L4.1 R33.1 R35.1 U4.16 U4.24
GND [PWR]: 3.0V_BAT.- C1.2 C2.2 C3.- C4.2 C5.2 C6.2 C9.1 C10.1 C11.1 C12.2 C13.1 C14.1 C15.1 C16.1 C17.1 C18.1 C19.1 C20.1 C21.1 C22.2 C23.1 C24.1 C25.2 C26.2 C27.2 C28.2 C29.2 C30.1 C31.2 C32.1 C33.2 C34.1 C35.2 C36.2 C37.2 C38.1 C39.2 C40.2 C41.2 C42.2 C43.2 C44.2 C45.2 C46.2 C47.2 C48.2 C49.2 C50.2 C51.2 C52.2 C53.2 C54.2 C55.2 C56.2 C57.2 C58.2 C59.1 C60.1 C61.1 C62.1 C63.2 C64.2 C65.2 C66.1 C67.1 C68.- C190.- C214.2 CD1.2 D1.A EXT1.2 EXT2.2 EXT2.40 GND_PIN.P$1 HDMI.2 HDMI.5 HDMI.8 HDMI.11 HDMI.17 HDMI.SH1 HDMI.SH2 HDMI.SH3 HDMI.SH4 L8.1 L9.1 LCD.2 LCD.4 PWR.- PWR.-- PWR_LED.C R1.2 R2.2 R14.2 R15.1 R29.1 R31.1 R32.2 R38.2 R40.2 R41.2 R42.2 R43.1 R44.1 R53.1 R54.1 R55.1 RK3188-SOM-EVB_PLATFORM1.1-2 RK3188-SOM-EVB_PLATFORM1.2-2 RK3188-SOM-EVB_PLATFORM1.3-4 RK3188-SOM-EVB_PLATFORM1.4-2 RK3188-SOM-EVB_PLATFORM1.LCD-2 RK3188-SOM-EVB_PLATFORM1.LCD-4 RM1.2.2 RM1.3.2 RM1.4.2 U1.4 U2.4 U3.24 U3.25 U3.EP1 U3.EP2 U3.EP3 U3.EP4 U3.EP5 U3.EP6 U3.EP7 U3.EP8 U3.EP9 U3.EXP_PAD U4.14 U4.15 U5.3 U5.8 U6.2 U7.3 U7.8 U8.GND U8.GND1 U8.GND2 U8.GND3 U8.GND4 U8.GND5 U9.3 U9.8 U10.2 U11.2 U11.3 U11.4 U11.7 U11.8 U11.14 U11.17 U11.20 UEXT1.2 UEXT2.2 USB_HOST1.4 USB_HOST2.4 USB_HOST3.4 USB_HOST4.4 USB_OTG.GND
GPIO0_A1: EXT2.5 RK3188-SOM-EVB_PLATFORM1.1-9
GPIO0_A2/ETH_SOFT_RST: R17.1 RK3188-SOM-EVB_PLATFORM1.1-11
GPIO0_A3/USB-HOST-DRV: R44.2 R51.2 RK3188-SOM-EVB_PLATFORM1.1-13 U6.4
GPIO0_A5: EXT2.7 RK3188-SOM-EVB_PLATFORM1.1-15
GPIO0_A6: EXT2.9 RK3188-SOM-EVB_PLATFORM1.1-17
GPIO0_A7: EXT2.11 RK3188-SOM-EVB_PLATFORM1.1-19
GPIO0_B0: EXT2.6 RK3188-SOM-EVB_PLATFORM1.1-8
GPIO0_B1: EXT2.8 RK3188-SOM-EVB_PLATFORM1.1-10
GPIO0_B2: EXT2.10 RK3188-SOM-EVB_PLATFORM1.1-12
GPIO0_B4/LED1: EXT1.18 RK3188-SOM-EVB_PLATFORM1.1-14
GPIO0_B6/LED2: EXT1.20 RK3188-SOM-EVB_PLATFORM1.1-18
GPIO0_B7: EXT2.12 RK3188-SOM-EVB_PLATFORM1.1-20
GPIO0_C0: EXT1.26 RK3188-SOM-EVB_PLATFORM1.3-8
GPIO0_C1: EXT1.28 RK3188-SOM-EVB_PLATFORM1.3-10
GPIO0_C2: EXT1.30 RK3188-SOM-EVB_PLATFORM1.3-12
GPIO0_C3: EXT1.32 RK3188-SOM-EVB_PLATFORM1.3-14
GPIO0_C4: EXT1.34 RK3188-SOM-EVB_PLATFORM1.3-16
GPIO0_C5: EXT1.36 RK3188-SOM-EVB_PLATFORM1.3-18
GPIO0_C6: EXT1.38 RK3188-SOM-EVB_PLATFORM1.3-20
GPIO0_C7: EXT1.40 RK3188-SOM-EVB_PLATFORM1.3-22
GPIO0_D0/FLASH_DQS: EXT1.23 RK3188-SOM-EVB_PLATFORM1.4-25
GPIO0_D1/FLASH_CSN1: EXT1.25 RK3188-SOM-EVB_PLATFORM1.4-27
GPIO0_D2/FLASH_CSN2: EXT1.27 RK3188-SOM-EVB_PLATFORM1.4-29
GPIO0_D3/FLASH_CSN3: EXT1.29 RK3188-SOM-EVB_PLATFORM1.4-31
GPIO0_D4/SPI1_MISO: RK3188-SOM-EVB_PLATFORM1.4-33 UEXT2.7
GPIO0_D5/SPI1_MOSI: RK3188-SOM-EVB_PLATFORM1.4-35 UEXT2.8
GPIO0_D6/SPI1_CLK: RK3188-SOM-EVB_PLATFORM1.4-37 UEXT2.9
GPIO0_D7/SPI1_CSNO: R58.1 RK3188-SOM-EVB_PLATFORM1.4-39 UEXT2.10
GPIO1_A0/UART0_RX: R9.1 RK3188-SOM-EVB_PLATFORM1.4-40 UEXT1.4
GPIO1_A1/UART0_TX: RK3188-SOM-EVB_PLATFORM1.4-38 UEXT1.3
GPIO1_A2: EXT2.14 RK3188-SOM-EVB_PLATFORM1.4-36
GPIO1_A3: EXT2.16 RK3188-SOM-EVB_PLATFORM1.4-34
GPIO1_A4/SPI0_MISO: RK3188-SOM-EVB_PLATFORM1.4-32 UEXT1.7
GPIO1_A5/SPI0_MOSI: RK3188-SOM-EVB_PLATFORM1.4-30 UEXT1.8
GPIO1_A6/SPI0_SCK: RK3188-SOM-EVB_PLATFORM1.4-28 UEXT1.9
GPIO1_A7/SPI0_CSN0: R11.1 RK3188-SOM-EVB_PLATFORM1.4-26 UEXT1.10
GPIO1_B2/UART3_RX: R57.1 RK3188-SOM-EVB_PLATFORM1.3-9 UEXT2.4
GPIO1_B3/UART3_TX: RK3188-SOM-EVB_PLATFORM1.3-11 UEXT2.3
GPIO1_B4: EXT1.35 RK3188-SOM-EVB_PLATFORM1.3-13
GPIO1_B5: EXT1.37 RK3188-SOM-EVB_PLATFORM1.3-15
GPIO1_B6/SPDIF_TX: RK3188-SOM-EVB_PLATFORM1.3-17 U8.2
GPIO1_B7/SDO: EXT1.39 R62.2 RK3188-SOM-EVB_PLATFORM1.3-19
GPIO1_C0: EXT1.31 RK3188-SOM-EVB_PLATFORM1.1-3
GPIO1_C1/I2S0_SCLK: RK3188-SOM-EVB_PLATFORM1.1-5 U8.7
GPIO1_C2/I2S0_LRCK_RX: R49.1 RK3188-SOM-EVB_PLATFORM1.1-7
GPIO1_C3/I2S0_LRCK_TX: R47.1 RK3188-SOM-EVB_PLATFORM1.1-4
GPIO1_C4: EXT1.33 RK3188-SOM-EVB_PLATFORM1.1-6
GPIO1_C5/I2S0_SDO0: RK3188-SOM-EVB_PLATFORM1.2-5 U8.5
GPIO1_D0/I2C0_SDA: R10.1 RK3188-SOM-EVB_PLATFORM1.3-31 UEXT1.6
GPIO1_D1/I2C0_SCL: R8.1 RK3188-SOM-EVB_PLATFORM1.3-33 UEXT1.5
GPIO1_D4/I2C2_SDA: R37.1 RK3188-SOM-EVB_PLATFORM1.3-35 U8.11
GPIO1_D5/I2C2_SCL: R39.1 RK3188-SOM-EVB_PLATFORM1.3-37 U8.12
GPIO1_D6/I2C4_SDA: R4.1 RK3188-SOM-EVB_PLATFORM1.2-39 UEXT2.6
GPIO1_D7/I2C4_SCL: R3.1 RK3188-SOM-EVB_PLATFORM1.2-40 UEXT2.5
GPIO2_A0/LCD1_D0: RK3188-SOM-EVB_PLATFORM1.2-23 U8.61
GPIO2_A1/LCD1_D1: RK3188-SOM-EVB_PLATFORM1.2-25 U8.60
GPIO2_A2/LCD1_D2: RK3188-SOM-EVB_PLATFORM1.2-27 U8.59
GPIO2_A3/LCD1_D3: RK3188-SOM-EVB_PLATFORM1.2-29 U8.58
GPIO2_A4/LCD1_D4: RK3188-SOM-EVB_PLATFORM1.2-31 U8.57
GPIO2_A5/LCD1_D5: RK3188-SOM-EVB_PLATFORM1.2-33 U8.55
GPIO2_A6/LCD1_D6: RK3188-SOM-EVB_PLATFORM1.2-35 U8.54
GPIO2_A7/LCD1_D7: RK3188-SOM-EVB_PLATFORM1.2-37 U8.53
GPIO2_B0/LCD1_D8: RK3188-SOM-EVB_PLATFORM1.2-7 U8.52
GPIO2_B1/LCD1_D9: RK3188-SOM-EVB_PLATFORM1.2-9 U8.50
GPIO2_B2/LCD1_D10: RK3188-SOM-EVB_PLATFORM1.2-11 U8.49
GPIO2_B3/LCD1_D11: RK3188-SOM-EVB_PLATFORM1.2-13 U8.48
GPIO2_B4/LCD1_D12: RK3188-SOM-EVB_PLATFORM1.2-15 U8.47
GPIO2_B5/LCD1_D13: RK3188-SOM-EVB_PLATFORM1.2-17 U8.46
GPIO2_B6/LCD1_D14: RK3188-SOM-EVB_PLATFORM1.2-19 U8.45
GPIO2_B7/LCD1_D15: RK3188-SOM-EVB_PLATFORM1.2-21 U8.44
GPIO2_C0/LCD1_D16: RK3188-SOM-EVB_PLATFORM1.2-38 U8.43
GPIO2_C1/LCD1_D17: RK3188-SOM-EVB_PLATFORM1.2-36 U8.42
GPIO2_C2/LCD1_D18: RK3188-SOM-EVB_PLATFORM1.2-34 U8.41
GPIO2_C3/LCD1_D19: RK3188-SOM-EVB_PLATFORM1.2-32 U8.40
GPIO2_C4/LCD1_D20: RK3188-SOM-EVB_PLATFORM1.2-30 U8.39
GPIO2_C5/LCD1_D21: RK3188-SOM-EVB_PLATFORM1.2-28 U8.38
GPIO2_C6/LCD1_D22: RK3188-SOM-EVB_PLATFORM1.2-26 U8.37
GPIO2_C7/LCD1_D23: RK3188-SOM-EVB_PLATFORM1.2-24 U8.36
GPIO2_D0/LCD1_DCLK: RK3188-SOM-EVB_PLATFORM1.2-22 U8.51
GPIO2_D1/LCD1_DEN: RK3188-SOM-EVB_PLATFORM1.2-20 U8.62
GPIO2_D2/LCD1_HSYNC: RK3188-SOM-EVB_PLATFORM1.2-18 U8.63
GPIO2_D3/LCD1_VSYNC: RK3188-SOM-EVB_PLATFORM1.2-16 U8.64
GPIO2_D4: EXT2.35 RK3188-SOM-EVB_PLATFORM1.2-14
GPIO2_D5: EXT2.36 RK3188-SOM-EVB_PLATFORM1.2-12
GPIO2_D6/HDMI_INT: R36.1 RK3188-SOM-EVB_PLATFORM1.2-10 U8.10
GPIO2_D7/USB-OTG-DRV: R55.2 RK3188-SOM-EVB_PLATFORM1.2-8 U10.4
GPIO3_A0: EXT2.37 RK3188-SOM-EVB_PLATFORM1.4-24
GPIO3_B1: EXT2.38 RK3188-SOM-EVB_PLATFORM1.3-24
GPIO3_B2/HDMI_RST: RK3188-SOM-EVB_PLATFORM1.3-26 U8.33
GPIO3_C0/RMII_TXEN: RK3188-SOM-EVB_PLATFORM1.3-28 U3.21
GPIO3_C1/RMII_TXD1: RK3188-SOM-EVB_PLATFORM1.3-30 U3.23
GPIO3_C2/RMII_TXD0: RK3188-SOM-EVB_PLATFORM1.3-32 U3.22
GPIO3_C3/RMII_RXD0: RK3188-SOM-EVB_PLATFORM1.3-34 RM2.2.2 U3.11
GPIO3_C4/RMII_RXD1: RK3188-SOM-EVB_PLATFORM1.3-36 RM2.1.2 U3.10
GPIO3_C5/RMII_CLK: R13.1 RK3188-SOM-EVB_PLATFORM1.3-38
GPIO3_C6/RMII_RX_ERR/PHYAD0: RK3188-SOM-EVB_PLATFORM1.3-40 RM1.4.1 U3.13
GPIO3_C7/RMII_CRS_DVALID: RK3188-SOM-EVB_PLATFORM1.3-39 RM2.3.2 U3.15
GPIO3_D0/RMII_MDIO: RK3188-SOM-EVB_PLATFORM1.3-21 RM2.4.2 U3.16
GPIO3_D1/RMII_MDC: RK3188-SOM-EVB_PLATFORM1.3-23 U3.17
GPIO3_D2/RMII_INT: R27.1 R28.1 RK3188-SOM-EVB_PLATFORM1.3-25
GPIO3_D4/PWM1: LCD.36 RK3188-SOM-EVB_PLATFORM1.LCD-36
GPIO3_D5/PWM2: EXT1.22 RK3188-SOM-EVB_PLATFORM1.3-27
GPIO3_D6: EXT1.24 RK3188-SOM-EVB_PLATFORM1.3-29
GPIO3_D7/LCD0_PWRE: LCD.35 RK3188-SOM-EVB_PLATFORM1.LCD-35
HCEC: HDMI.13 R52.1 U5.1 U5.10 U8.17
HDMI_5V_SOURCE: FUSE1.2 HDMI.18
HHPD: HDMI.19 R41.1 U5.5 U5.6 U8.14
HSCL: HDMI.15 R48.1 R50.1 U5.2 U5.9
HSDA: HDMI.16 R45.1 R46.1 U5.4 U5.7
HTX0N: HDMI.9 U7.2 U7.9 U8.24
HTX0P: HDMI.7 U7.1 U7.10 U8.25
HTX1N: HDMI.6 U8.26 U9.5 U9.6
HTX1P: HDMI.4 U8.27 U9.4 U9.7
HTX2N: HDMI.3 U8.29 U9.2 U9.9
HTX2P: HDMI.1 U8.30 U9.1 U9.10
HTXCN: HDMI.12 U7.5 U7.6 U8.21
HTXCP: HDMI.10 U7.4 U7.7 U8.22
I2C1_SCL: R20.1 RK3188-SOM-EVB_PLATFORM1.2-3 U2.6
I2C1_SDA: R19.1 RK3188-SOM-EVB_PLATFORM1.2-4 U2.5
I2S0_LRCK: R47.2 R49.2 U8.6
LCD0_CLK: LCD.31 RK3188-SOM-EVB_PLATFORM1.LCD-31
LCD0_D0: LCD.21 RK3188-SOM-EVB_PLATFORM1.LCD-21
LCD0_D1: LCD.22 RK3188-SOM-EVB_PLATFORM1.LCD-22
LCD0_D2: LCD.23 RK3188-SOM-EVB_PLATFORM1.LCD-23
LCD0_D3: LCD.24 RK3188-SOM-EVB_PLATFORM1.LCD-24
LCD0_D4: LCD.25 RK3188-SOM-EVB_PLATFORM1.LCD-25
LCD0_D5: LCD.26 RK3188-SOM-EVB_PLATFORM1.LCD-26
LCD0_D6: LCD.27 RK3188-SOM-EVB_PLATFORM1.LCD-27
LCD0_D7: LCD.28 RK3188-SOM-EVB_PLATFORM1.LCD-28
LCD0_D8: LCD.13 RK3188-SOM-EVB_PLATFORM1.LCD-13
LCD0_D9: LCD.14 RK3188-SOM-EVB_PLATFORM1.LCD-14
LCD0_D10: LCD.15 RK3188-SOM-EVB_PLATFORM1.LCD-15
LCD0_D11: LCD.16 RK3188-SOM-EVB_PLATFORM1.LCD-16
LCD0_D12: LCD.17 RK3188-SOM-EVB_PLATFORM1.LCD-17
LCD0_D13: LCD.18 RK3188-SOM-EVB_PLATFORM1.LCD-18
LCD0_D14: LCD.19 RK3188-SOM-EVB_PLATFORM1.LCD-19
LCD0_D15: LCD.20 RK3188-SOM-EVB_PLATFORM1.LCD-20
LCD0_D16: LCD.5 RK3188-SOM-EVB_PLATFORM1.LCD-5
LCD0_D17: LCD.6 RK3188-SOM-EVB_PLATFORM1.LCD-6
LCD0_D18: LCD.7 RK3188-SOM-EVB_PLATFORM1.LCD-7
LCD0_D19: LCD.8 RK3188-SOM-EVB_PLATFORM1.LCD-8
LCD0_D20: LCD.9 RK3188-SOM-EVB_PLATFORM1.LCD-9
LCD0_D21: LCD.10 RK3188-SOM-EVB_PLATFORM1.LCD-10
LCD0_D22: LCD.11 RK3188-SOM-EVB_PLATFORM1.LCD-11
LCD0_D23: LCD.12 RK3188-SOM-EVB_PLATFORM1.LCD-12
LCD0_DE: LCD.32 RK3188-SOM-EVB_PLATFORM1.LCD-32
LCD0_HSYNC: LCD.29 RK3188-SOM-EVB_PLATFORM1.LCD-29
LCD0_VSYNC: LCD.30 RK3188-SOM-EVB_PLATFORM1.LCD-30
LCD_L/R: LCD.33 RK3188-SOM-EVB_PLATFORM1.LCD-33
LCD_U/D: LCD.34 RK3188-SOM-EVB_PLATFORM1.LCD-34
N$1: R62.1 U11.9
N$2 [PWR]: C214.1 LAN.GND1 LAN.GND2
N$18: CD1.1 R12.2
N$21: LAN.2 R22.1 U3.28
N$22: LAN.KG U3.2
N$24: C13.2 C14.2 U3.6
N$31: C10.2 R16.2 R17.2 U3.19
N$32: R43.2 U6.3
N$33: R31.2 U4.4
N$34: C39.1 L7.2 USB_HOST1.1
N$35: R42.1 U8.20
N$36: R40.1 U8.31
N$37: C32.2 R32.1 R34.1 U4.13
N$38: L8.2 USB_HOST1.P$3 USB_HOST1.P$4 USB_HOST2.P$3 USB_HOST2.P$4 USB_HOST3.P$3 USB_HOST3.P$4 USB_HOST4.P$3 USB_HOST4.P$4
N$39: C22.1 L3.2 USB_HOST4.1
N$40: C23.2 C30.2 C34.2 C38.2 C59.2 C60.2 C61.2 C62.2 C68.+ C190.+ L3.1 L5.1 L6.1 L7.1 R30.2 U6.1
N$41: LAN.1 R21.1 U3.29
N$44: LAN.7 R23.1 U3.31
N$45: C4.1 U1.8
N$46: R7.2 U1.7
N$47: C36.1 L6.2 USB_HOST2.1
N$48: C31.1 L5.2 USB_HOST3.1
N$49: LAN.8 R24.1 U3.30
N$50: R33.2 U4.17
N$51: C8.1 U1.1
N$52: C8.2 L1.1 U1.3
N$53: C50.1 C51.1 C52.1 C53.1 L11.2 U8.9 U8.13 U8.19
N$54: LAN.AY U3.3
N$55: R15.2 U3.32
N$56: C9.2 LAN.3 LAN.6 R26.1
N$57: LAN.KY R14.1
N$59: C15.2 C16.2 C17.2 L2.1 R21.2 R22.2 R23.2 R24.2 R25.1 R26.2 U3.1 U3.27
N$60: C7.1 U1.6
N$61: R48.2 U8.16
N$62: R45.2 U8.15
N$63: R27.2 U3.18
N$64: C7.2 R1.1
N$65: LAN.AG R25.2
N$66: R2.1 R6.1 U1.5
N$67: C1.1 C2.1 C5.1 C6.1 D2.A FET1.1 L1.2 R6.2
N$68: 5V_E.1 D2.K FET1.2
N$77: R38.1 U8.32
N$105: R35.2 U4.18
N$115: R54.2 U10.3
N$124: C12.1 Q1.1 U2.1
N$129: PWR_LED.A R5.2
N$133: Q1.4 U2.2
N$136: 3.0V_BAT.1+ 3.0V_BAT.+ D3.2
N$137: C55.1 C63.1 L10.2 R56.2 U10.1
N$266: L9.2 USB_OTG.GND1 USB_OTG.GND2 USB_OTG.GND3 USB_OTG.GND4
NALE: EXT1.12 RK3188-SOM-EVB_PLATFORM1.4-18
NCE0: EXT1.16 RK3188-SOM-EVB_PLATFORM1.4-22
NCLE: EXT1.10 RK3188-SOM-EVB_PLATFORM1.4-16
NDQ0: EXT1.7 RK3188-SOM-EVB_PLATFORM1.4-9
NDQ1: EXT1.9 RK3188-SOM-EVB_PLATFORM1.4-11
NDQ2: EXT1.11 RK3188-SOM-EVB_PLATFORM1.4-13
NDQ3: EXT1.13 RK3188-SOM-EVB_PLATFORM1.4-15
NDQ4: EXT1.15 RK3188-SOM-EVB_PLATFORM1.4-17
NDQ5: EXT1.17 RK3188-SOM-EVB_PLATFORM1.4-19
NDQ6: EXT1.19 RK3188-SOM-EVB_PLATFORM1.4-21
NDQ7: EXT1.21 RK3188-SOM-EVB_PLATFORM1.4-23
NRB0: EXT1.6 RK3188-SOM-EVB_PLATFORM1.4-7
NRE: EXT1.8 RK3188-SOM-EVB_PLATFORM1.4-14
NWE: EXT1.14 RK3188-SOM-EVB_PLATFORM1.4-20
NWP: EXT1.5 RK3188-SOM-EVB_PLATFORM1.4-5
OTG_DM: RK3188-SOM-EVB_PLATFORM1.4-8 USB_OTG.D-
OTG_DP: RK3188-SOM-EVB_PLATFORM1.4-6 USB_OTG.D+
OTG_ID: RK3188-SOM-EVB_PLATFORM1.4-3 USB_OTG.ID
OTG_VBUS: C56.1 R53.2 R56.1 RK3188-SOM-EVB_PLATFORM1.4-4
PHYAD1: RM1.3.1 U3.7
PHYAD2: RM1.2.1 U3.8
RESET: EXT2.4 RK3188-SOM-EVB_PLATFORM1.2-6
RMII_REF_CLK_50MHZ: CD1.3 R13.2 U3.5
RMIISEL: RM1.1.1 U3.9
RTC_CLKOUT: R18.1 RK3188-SOM-EVB_PLATFORM1.3-6 U2.7
RTC_INT: RK3188-SOM-EVB_PLATFORM1.1-16 U2.3
RTC_VDD: C11.2 D3.3 U2.8
USB-HOST_DM: RK3188-SOM-EVB_PLATFORM1.4-10 U4.25
USB-HOST_DP: RK3188-SOM-EVB_PLATFORM1.4-12 U4.26
VCC [PWR]: C47.1 C48.1 C49.1 C64.1 C65.1 D3.1 EXT2.1 EXT2.3 L11.1 LCD.3 R3.2 R4.2 R8.2 R9.2 R10.2 R11.2 R18.2 R19.2 R20.2 R36.2 R37.2 R39.2 R51.1 R52.2 R57.2 R58.2 R60.2 R61.2 RK3188-SOM-EVB_PLATFORM1.2-1 RK3188-SOM-EVB_PLATFORM1.LCD-3 U8.1 U8.34 U11.1 UEXT1.1 UEXT2.1
VDD: C18.2 C19.2 C20.2 CD1.4 L2.2 R12.1 R16.1 R28.2 RK3188-SOM-EVB_PLATFORM1.3-2 RM1.1.2 RM2.1.1 RM2.2.1 RM2.3.1 RM2.4.1 U3.12
VDD_HDMI: C40.1 C41.1 C42.1 C43.1 C44.1 C45.1 C46.1 RK3188-SOM-EVB_PLATFORM1.3-1 U8.8 U8.18 U8.23 U8.28 U8.35 U8.56
VPP [PWR]: EXT1.1 RK3188-SOM-EVB_PLATFORM1.3-3
WAKE: R59.1 U11.5
X1: C24.2 Q2.2 U4.6
X2: C21.2 Q2.1 U4.7
X+: LCD.38 U11.18
X-: C67.2 LCD.37 R59.2 U11.19
Y+: LCD.40 U11.15
Y-: C66.2 LCD.39 U11.16

## Tracks (layer width: path | path; a pad name or v marks a point on that pad's centre or on a via)
#OVCUR1
  Top 0.356: U4.21 31.06,37.14 R29.2
  Top 1.016: R29.2 R30.1
+5V  (via drill 0.4, 0.6, 0.8)
  Top 0.356: U4.23 28.49,38.44 29.08,37.85 30.23,37.85 30.73,38.35
  Top 0.508: U6.5 25.97,46.8 26.67,47.5
  Top 0.762: RK3188-SOM-EVB_PLATFORM1.1-1 30.48,65.79 v29.46,65.79 | v83.82,63.75 RK3188-SOM-EVB_PLATFORM1.LCD-1
  Top 1.016: v124.33,4.32 R5.1 | 26.67,47.5 C37.1 v27.18,48.51 | R34.2 15.88,32 16.13,31.75 v16.13,28.32 | 30.73,38.35 C33.1 C35.1 v31.37,40.89 | U10.5 26.67,18.35 C58.1 | C58.1 C57.1 | C58.1 26.67,19.56 27.18,20.07 v27.18,23.75 | R46.2 R50.2 v28.96,70.74 | FUSE1.1 16.39,73.15 v18.29,73.15 | 5V_E.2 107.31,30.23 v98.42,30.23 v83.82,30.23 75.44,30.23 v74.8,30.86 | EXT2.39 64.14,77.85 v65.28,77.85 | v73.15,77.85 74.3,77.85 LCD.1 74.3,74.3 v73.28,74.3
  Bottom 0.254: v124.33,4.32 123.95,4.32 108.08,20.19 107.19,20.19 106.68,20.7 106.17,20.7 105.66,21.21 105.16,21.21 104.14,22.23 103.12,22.23 102.23,23.11 101.22,23.11 98.17,26.16 98.17,29.97 v98.42,30.23
  Bottom 1.016: v16.13,28.32 20.7,23.75 v27.18,23.75 29.08,23.75 36.83,31.5 | v73.15,77.85 v65.28,77.85 | 28.96,65.79 v28.96,70.74 26.67,73.03 18.41,73.03 v18.29,73.15 | 36.83,31.5 36.83,36.2 34.92,38.1 33.91,38.1 31.37,40.64 v31.37,40.89 31.11,40.89 29.59,42.42 29.59,43.05 27.18,45.47 v27.18,48.51 27.18,64.01 28.96,65.79 | 28.96,65.79 v29.46,65.79 | v73.28,74.3 75.31,72.26 77.47,72.26 81.92,67.82 81.92,65.66 v83.82,63.75 v83.82,30.23 | 36.83,31.5 74.17,31.5 v74.8,30.86
+5V_OTG_PWR  (via drill 0.6)
  Top 0.508: 7.62,14.48 7.62,14.17 USB_OTG.VBUS 7.02,14.26 7.49,14.73
  Top 0.762: RK3188-SOM-EVB_PLATFORM1.4-1 57.15,16.51 57.02,16.64
  Top 1.016: FET1.3 108.84,28.83 108.71,28.96 v73.53,28.96 | 57.02,16.64 55.88,17.78 v54.61,17.78 | v9.14,16 v9.14,14.99 8.64,14.48 7.62,14.48 v9.14,16
  Top 1.27: v9.14,14.99 C54.1 12.19,14.99 L10.1
  Bottom 1.016: 10.29,16.13 18.41,16.13 20.07,17.78 v54.61,17.78 65.79,28.96 v73.53,28.96 | 10.29,16.13 v9.14,14.99 v9.14,16 9.14,16.13 10.29,16.13
+12V  (via drill 0.6, 0.8)
  Top 1.016: 108.84,23.11 109.6,23.11 | 109.6,23.11 U1.2 | 108.84,23.11 v108.84,23.62 109.09,23.62 109.6,23.11 | 108.84,23.11 v108.84,22.35 109.6,23.11 | R7.1 102.23,23.5 v103.12,24.38 | v124.33,15.88 124.33,15.24 v124.33,14.61
  Top 2.54: 126.11,15.24 129.79,15.24 PWR.+ 129.79,19.56 | 126.11,15.24 126.11,12.32 124.21,10.41 C3.+ | 124.33,15.24 126.11,15.24 | 126.11,15.24 D1.C
  Bottom 1.016: v103.12,24.38 107.82,24.38 108.84,23.37
  Bottom 1.524: v124.33,15.88 v124.33,14.61 | 108.84,23.37 v108.84,23.62
  Bottom 2.032: 108.84,23.37 v108.84,22.35 110.11,22.35 | 110.11,22.35 117.86,22.35 v124.33,15.88 v124.33,14.61 | v108.84,23.62 110.11,22.35
  Bottom 2.54: 129.79,19.56 PWR.+ 129.79,16.51
ADC_IN0  (via drill 0.4)
  Top 0.508: RK3188-SOM-EVB_PLATFORM1.3-5 86.36,14.61 v86.61,14.35 | EXT1.3 70.48,4.19 v69.6,4.19
  Bottom 0.254: v69.6,4.19 69.98,4.19 72.77,6.99 82.68,6.99 86.23,10.54 86.23,13.97 v86.61,14.35
ADC_IN2  (via drill 0.4)
  Top 0.254: 70.48,6.99 EXT1.4
  Top 0.508: v86.36,17.27 87,17.27 87.63,16.64 RK3188-SOM-EVB_PLATFORM1.3-7 | v69.47,6.99 70.48,6.99
  Bottom 0.254: v69.47,6.99 69.98,7.49 82.42,7.49 85.72,10.79 85.72,16.51 86.36,17.14 v86.36,17.27
AVDD2  (via drill 0.6)
  Top 0.356: U4.1 18.7,41.69 v18.67,41.66 | U4.5 19.15,39.09 v18.67,38.61 | U4.10 19.41,35.84 18.16,37.08
  Top 1.016: v18.67,41.66 C27.1 17.65,43.31 L4.2 | v18.67,38.61 C26.1 C25.1 18.16,37.08
  Bottom 1.016: v18.67,38.61 v18.67,41.66
CIF_CLKI
  Top 0.254: 44.45,70.61 41.91,73.15 40.26,73.15 39.75,73.66 39.75,79.88 39.62,80.01
  Top 0.508: 44.45,70.61 RK3188-SOM-EVB_PLATFORM1.1-24 | EXT2.20 38.73,80.9 39.62,80.01
CIF_CLKO
  Top 0.254: 45.72,70.61 42.67,73.66 40.51,73.66 40.26,73.91 40.26,79.88 40.39,80.01
  Top 0.508: 45.72,70.61 RK3188-SOM-EVB_PLATFORM1.1-26 | EXT2.22 41.27,80.9 40.39,80.01
CIF_D0  (via drill 0.4)
  Top 0.508: v31.11,78.87 EXT2.13 | RK3188-SOM-EVB_PLATFORM1.1-21 v43.18,66.67
  Bottom 0.254: v43.18,66.67 43.18,70.87 36.45,77.6 34.16,77.6 33.66,78.11 31.88,78.11 v31.11,78.87
CIF_D1  (via drill 0.4)
  Top 0.508: v33.66,78.87 EXT2.15 | RK3188-SOM-EVB_PLATFORM1.1-23 v44.45,66.67
  Bottom 0.254: v44.45,66.67 44.45,70.36 36.7,78.11 34.42,78.11 v33.66,78.87
CIF_D2  (via drill 0.4)
  Top 0.508: v36.2,78.87 EXT2.17 | RK3188-SOM-EVB_PLATFORM1.1-25 v45.72,66.67
  Bottom 0.254: v45.72,66.67 45.72,69.85 36.96,78.61 36.45,78.61 v36.2,78.87
CIF_D3  (via drill 0.4)
  Top 0.508: v38.73,78.87 EXT2.19 | RK3188-SOM-EVB_PLATFORM1.1-27 v46.99,66.67
  Bottom 0.254: v46.99,66.67 46.99,69.34 38.73,77.6 v38.73,78.87
CIF_D4  (via drill 0.4)
  Top 0.508: v41.27,78.87 EXT2.21 | RK3188-SOM-EVB_PLATFORM1.1-29 v48.26,66.67
  Bottom 0.254: v48.26,66.67 48.26,68.71 48.26,68.83 41.27,75.82 v41.27,78.87
CIF_D5  (via drill 0.4)
  Top 0.508: v44.58,73.66 43.81,74.42 EXT2.23 | RK3188-SOM-EVB_PLATFORM1.1-31 v49.53,66.67
  Bottom 0.254: v49.53,66.67 49.53,68.33 44.58,73.28 v44.58,73.66
CIF_D6  (via drill 0.4)
  Top 0.508: v46.35,72.64 EXT2.25 | RK3188-SOM-EVB_PLATFORM1.1-33 v50.8,66.67
  Bottom 0.254: v50.8,66.67 50.8,67.82 46.35,72.26 v46.35,72.64
CIF_D7  (via drill 0.4)
  Top 0.254: v48.9,70.87 48.9,72.9
  Top 0.508: 48.9,72.9 EXT2.27 | RK3188-SOM-EVB_PLATFORM1.1-35 v52.07,66.67
  Bottom 0.254: v52.07,66.67 52.07,67.31 48.9,70.48 v48.9,70.87
CIF_D8  (via drill 0.4)
  Top 0.254: v51.31,70.99 51.44,71.12
  Top 0.508: 51.44,71.12 EXT2.29 | RK3188-SOM-EVB_PLATFORM1.1-37 v53.34,66.67
  Bottom 0.254: v53.34,66.67 53.34,66.8 51.31,68.83 v51.31,70.99
CIF_D9  (via drill 0.4)
  Top 0.254: v52.83,70.99 53.98,72.14 53.98,72.9
  Top 0.508: RK3188-SOM-EVB_PLATFORM1.1-39 v54.61,66.67 | 53.98,72.9 EXT2.31
  Bottom 0.254: v54.61,66.67 54.74,66.8 54.74,67.69 52.83,69.6 v52.83,70.99
CIF_D10/SDA  (via drill 0.4)
  Top 0.254: 54.61,70.61 54.61,70.87 56.52,72.77 56.52,72.9 | U11.13 v93.34,43.33 94.26,43.33 R60.1
  Top 0.508: RK3188-SOM-EVB_PLATFORM1.1-40 54.61,70.61 | 56.52,72.9 56.52,75.95 | 56.52,75.95 EXT2.33 | 56.52,75.95 v57.4,75.95
  Bottom 0.254: v57.4,75.95 57.66,75.69 77.98,75.69 85.72,67.94 85.72,65.79 86.49,65.02 86.49,48.13 89.66,44.96 89.66,43.43 90.04,43.05 93.06,43.05 v93.34,43.33
CIF_D11/SCL  (via drill 0.4)
  Top 0.254: 53.34,70.23 53.34,70.36 55.24,72.26 v55.24,75.44 55.24,79.63 | U11.11 v93.34,42.03 94.24,42.03 R61.1
  Top 0.508: RK3188-SOM-EVB_PLATFORM1.1-38 53.34,70.23 | EXT2.34 56.52,80.9 55.24,79.63
  Bottom 0.254: v55.24,75.44 55.5,75.18 77.72,75.18 85.22,67.69 85.22,65.53 85.98,64.77 85.98,47.88 89.15,44.7 89.15,43.18 89.79,42.55 92.83,42.55 v93.34,42.03
CIF_D12
  Top 0.254: 52.07,70.48 52.07,71.37 52.7,72.01 52.7,79.63
  Top 0.508: RK3188-SOM-EVB_PLATFORM1.1-36 52.07,70.48 | EXT2.32 53.98,80.9 52.7,79.63
CIF_D13
  Top 0.254: 50.55,70.48 50.42,70.61 50.42,79.76 50.55,79.88
  Top 0.508: RK3188-SOM-EVB_PLATFORM1.1-34 50.8,70.23 50.55,70.48 | EXT2.30 51.44,80.77 50.55,79.88
CIF_D14
  Top 0.254: 49.78,70.48 49.91,70.61 49.91,79.76 49.78,79.88
  Top 0.508: RK3188-SOM-EVB_PLATFORM1.1-32 49.53,70.23 49.78,70.48 | EXT2.28 48.9,80.77 49.78,79.88
CIF_D15
  Top 0.254: 48.01,70.48 47.88,70.61 47.88,79.38 47.75,79.5
  Top 0.508: RK3188-SOM-EVB_PLATFORM1.1-30 48.26,70.23 48.01,70.48 | EXT2.26 46.35,80.9 47.75,79.5
CIF_HREF
  Top 0.254: 43.18,70.61 41.15,72.64 40.01,72.64 38.99,73.66 37.97,73.66 37.72,73.91 37.72,79.5
  Top 0.508: 43.18,70.61 RK3188-SOM-EVB_PLATFORM1.1-22 | EXT2.18 36.2,81.03 37.72,79.5
CIF_VSYNC
  Top 0.254: 47.24,70.48 47.37,70.61 47.37,78.87 46.35,79.88 44.83,79.88 44.7,80.01
  Top 0.508: RK3188-SOM-EVB_PLATFORM1.1-28 46.99,70.23 47.24,70.48 | EXT2.24 43.81,80.9 44.7,80.01
DM1  (via drill 0.5)
  Top 0.356: U4.27 26.18,41.04 v25.78,40.64
  Bottom 0.508: 4.08,53.74 4.32,53.98 4.32,56.39 6.22,58.29 11.34,58.29 16.76,52.87 16.76,50.84 25.78,41.82 v25.78,40.64
  Bottom 1.016: USB_HOST1.2 4.08,53.74
DM2  (via drill 0.5)
  Top 0.356: U4.2 21.61,41.04 v21.97,41.4
  Bottom 0.508: 4.08,44.09 4.32,44.32 4.32,46.74 6.22,48.64 14.02,48.64 21.26,41.4 v21.97,41.4
  Bottom 1.016: USB_HOST2.2 4.08,44.09
DM3  (via drill 0.5)
  Top 0.356: U4.8 22.3,37.14 v22.48,36.96
  Bottom 0.508: 4.08,34.44 4.32,34.67 4.32,37.08 6.22,38.99 13.36,38.99 15.39,36.96 v22.48,36.96
  Bottom 1.016: USB_HOST3.2 4.08,34.44
DM4  (via drill 0.5)
  Top 0.356: U4.11 22.09,35.19 v22.61,34.67
  Bottom 0.508: 4.08,24.91 4.32,25.15 4.32,27.43 6.22,29.34 11.56,29.34 16.89,34.67 v22.61,34.67
  Bottom 1.016: USB_HOST4.2 4.08,24.91
DP1  (via drill 0.5)
  Top 0.356: U4.28 25.05,41.69 v24.77,41.4
  Bottom 0.508: v24.77,41.4 24.77,41.91 16.1,50.57 16.1,52.6 11.05,57.66 6.5,57.66 4.95,56.11 4.95,54.84 6.08,53.71
  Bottom 1.016: USB_HOST1.3 6.08,53.71
DP2  (via drill 0.5)
  Top 0.356: U4.3 21.84,40.39 v21.97,40.26
  Bottom 0.508: 6.08,44.05 6.08,44.08 4.95,45.21 4.95,46.46 6.5,48.01 13.74,48.01 21.49,40.26 v21.97,40.26
  Bottom 1.016: 6.08,44.05 USB_HOST2.3
DP3  (via drill 0.5)
  Top 0.356: v22.73,35.81 22.23,35.81 21.55,36.49 U4.9
  Bottom 0.508: 6.08,34.4 4.95,35.53 4.95,36.8 6.5,38.35 13.08,38.35 15.11,36.32 21.84,36.32 22.35,35.81 v22.73,35.81
  Bottom 1.016: 6.08,34.4 USB_HOST3.3
DP4  (via drill 0.5)
  Top 0.356: U4.12 21.34,34.54 22.35,33.53 v22.61,33.53
  Bottom 0.508: v22.61,33.53 22.35,33.53 21.84,34.04 17.17,34.04 11.84,28.7 6.5,28.7 4.95,27.15 4.95,25.88 6.08,24.75
  Bottom 1.016: USB_HOST4.3 6.08,24.75
DVDD1  (via drill 0.6)
  Top 0.356: U4.24 29.24,39.09 v29.46,38.86 | U4.16 28.59,33.89 v29.08,33.4
  Top 1.016: L4.1 15.88,43.56 C28.1 15.88,46.61 | 15.88,46.61 C29.1 | v15.88,48.26 15.88,46.61 | 33.15,33.4 R33.1 | 33.15,33.4 R35.1 | v34.16,33.27 33.27,33.27 33.15,33.4 | v20.95,43.18 25.91,43.18 v26.42,42.67
  Bottom 1.016: v20.95,43.18 v15.88,48.26 | v29.08,33.4 31.11,33.4 | v26.42,42.67 27.05,42.04 27.05,41.27 v29.46,38.86 31.11,37.21 31.11,33.4 | v34.16,33.27 31.24,33.27 31.11,33.4
GND  (via drill 0.4, 0.6, 1)
  Top 0.254: U3.25 111.25,40.03 v111.25,39.24 110.46,39.24 U3.24 | HDMI.2 10.22,62.8 v10.03,62.99 | HDMI.5 10.37,64.3 v10.03,64.64 | HDMI.8 10.4,65.8 v10.03,66.17 | HDMI.11 10.29,67.3 v10.03,67.56 | HDMI.17 10.36,70.3 v10.03,69.98 | U4.15 27.85,33.24 | PWR_LED.C 124.46,1.78 129.29,6.6 C3.-
  Top 0.356: 20.7,33.24 U4.14 19.78,33.24 19.3,32.77 v19.3,32.26 | 20.7,32.89 20.7,33.24 | U4.15 27.05,33.24 27.05,33.15 | 27.05,32.89 27.05,33.15 | 27.85,33.24 28.32,32.77 v28.32,32.13 | 20.7,33.24 21.5,33.24 22.1,32.64 v22.1,32.26 | 27.05,33.15 25.65,33.15 | 25.65,33.15 v25.65,32.38 | 25.65,33.15 v25.65,33.53
  Top 0.381: v13.59,69.6 U5.8 U5.3 | v13.59,66.55 U7.8 U7.3 | v13.59,63.5 U9.8 U9.3
  Top 0.406: U11.20 90.93,47.88 C65.2 | U11.17 90.51,45.93 v90.42,45.85 | U11.14 90.59,43.98 v90.42,43.81 | U11.3 85.98,46.58 | U11.2 85.74,47.23 85.98,46.99 v85.98,46.61 85.98,46.58 | U11.4 85.68,45.93 85.98,46.23 85.98,46.58 | U11.7 85.81,43.98 85.98,43.81 v85.98,43.69 85.98,43.56 85.75,43.33 U11.8
  Top 0.508: 100.84,45.97 RM1.2.2 | R43.1 20.7,46.74 21.59,45.85 U6.2 23.5,45.85 23.88,46.23 23.88,47.5 24.13,47.75 | 7.49,10.54 7.49,10.97 USB_OTG.GND 6.48,10.97 6.48,10.54 | C50.2 45.85,61.98 45.85,63.12 46.48,63.75 49.4,63.75 49.91,63.25 49.91,62.36 C51.2
  Top 0.762: U2.4 108.84,56.01 109.47,56.64 | 23.5,17.4 U10.2 | 23.5,17.4 v23.5,19.05 | 23.5,17.4 23.5,15.88 24,15.37 R54.1 | v61.98,52.07 C43.2 | R41.2 22.23,73.79 v22.23,74.17 | RK3188-SOM-EVB_PLATFORM1.3-4 85.09,20.83 v88.39,24.13 | RK3188-SOM-EVB_PLATFORM1.4-2 57.15,20.32 v55.37,20.32 | v85.09,70.74 RK3188-SOM-EVB_PLATFORM1.LCD-4 | v83.82,71.12 RK3188-SOM-EVB_PLATFORM1.LCD-2 | v55.75,69.34 RK3188-SOM-EVB_PLATFORM1.2-2 | RK3188-SOM-EVB_PLATFORM1.1-2 v30.48,70.74 | C41.2 35.43,53.09 v34.29,54.23 | v34.29,49.78 C42.2 | v34.29,58.93 R42.2